# Altium PCB CARD-PIN.PCBDOC (part 1 of 2)
Units mil, origin at the board's own origin, x right, y up, seen from the top; angles counter-clockwise.
Board outline 5110 x 4320 mil, 2 copper layers (Top Layer, Bottom Layer); 210 components, 32 nets, 825 pads, 362 vias.
Unrouted connection lines stored in the file: 455.
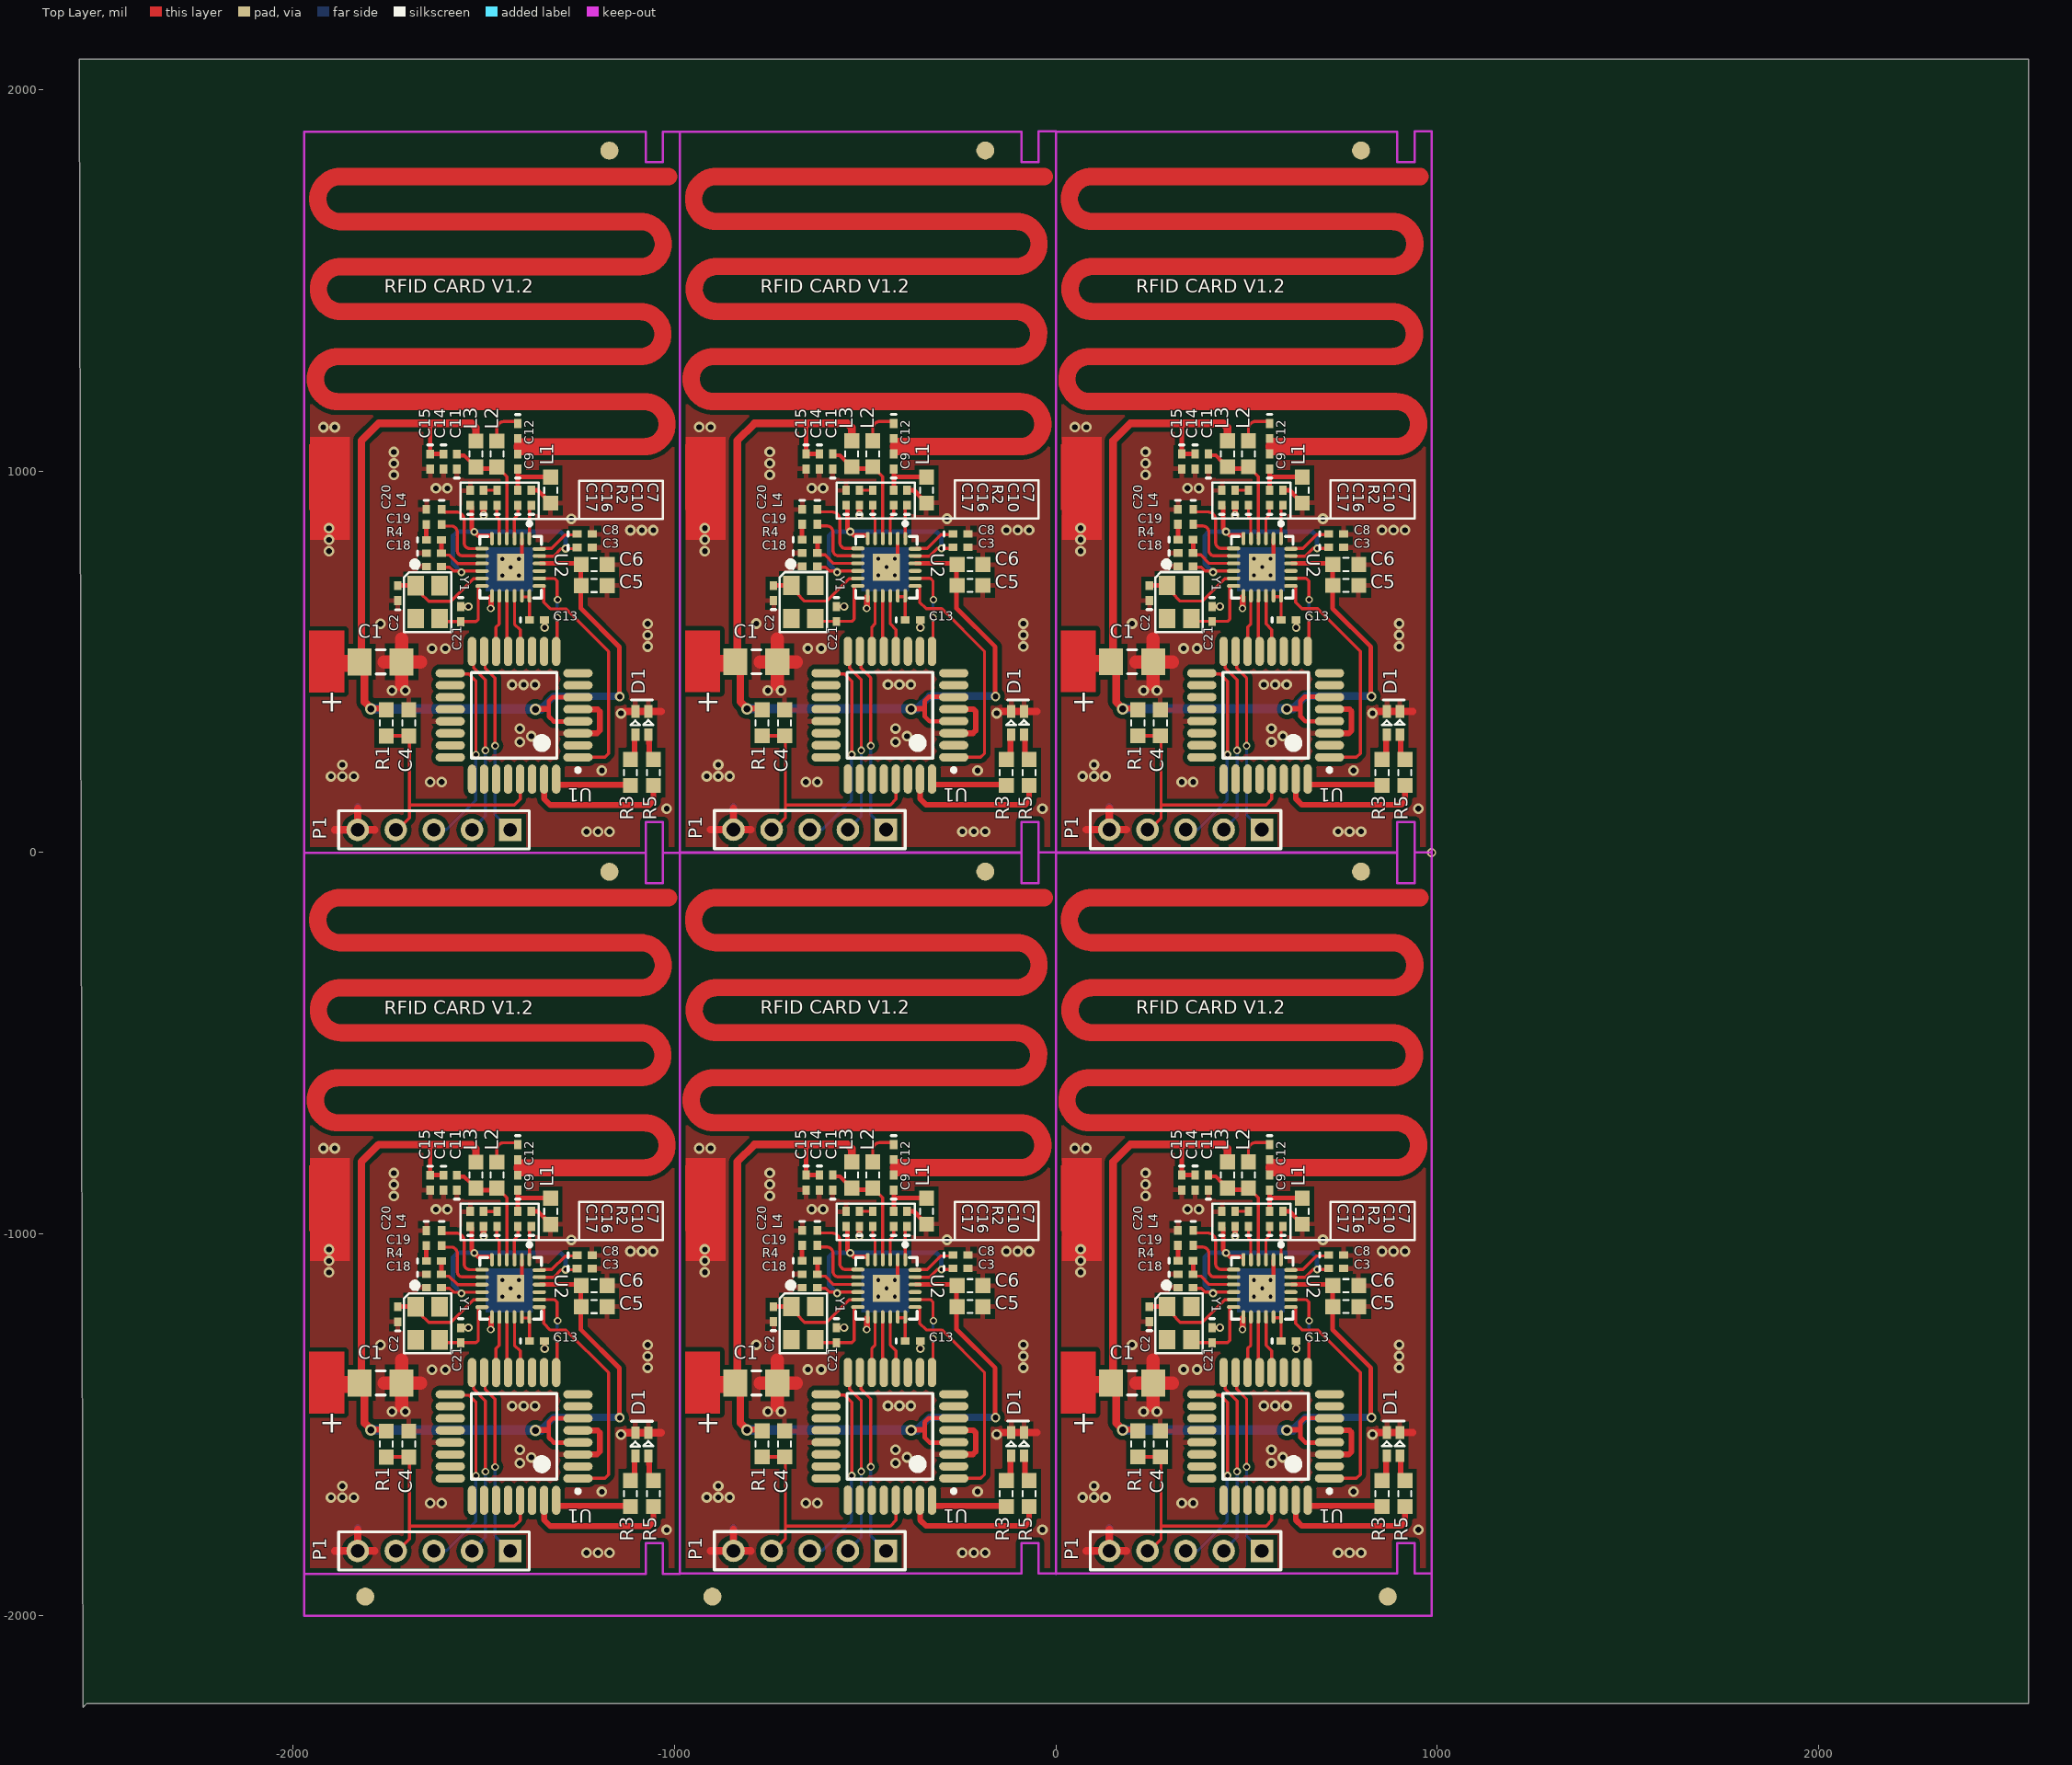
[diagram p0: Top Layer view]
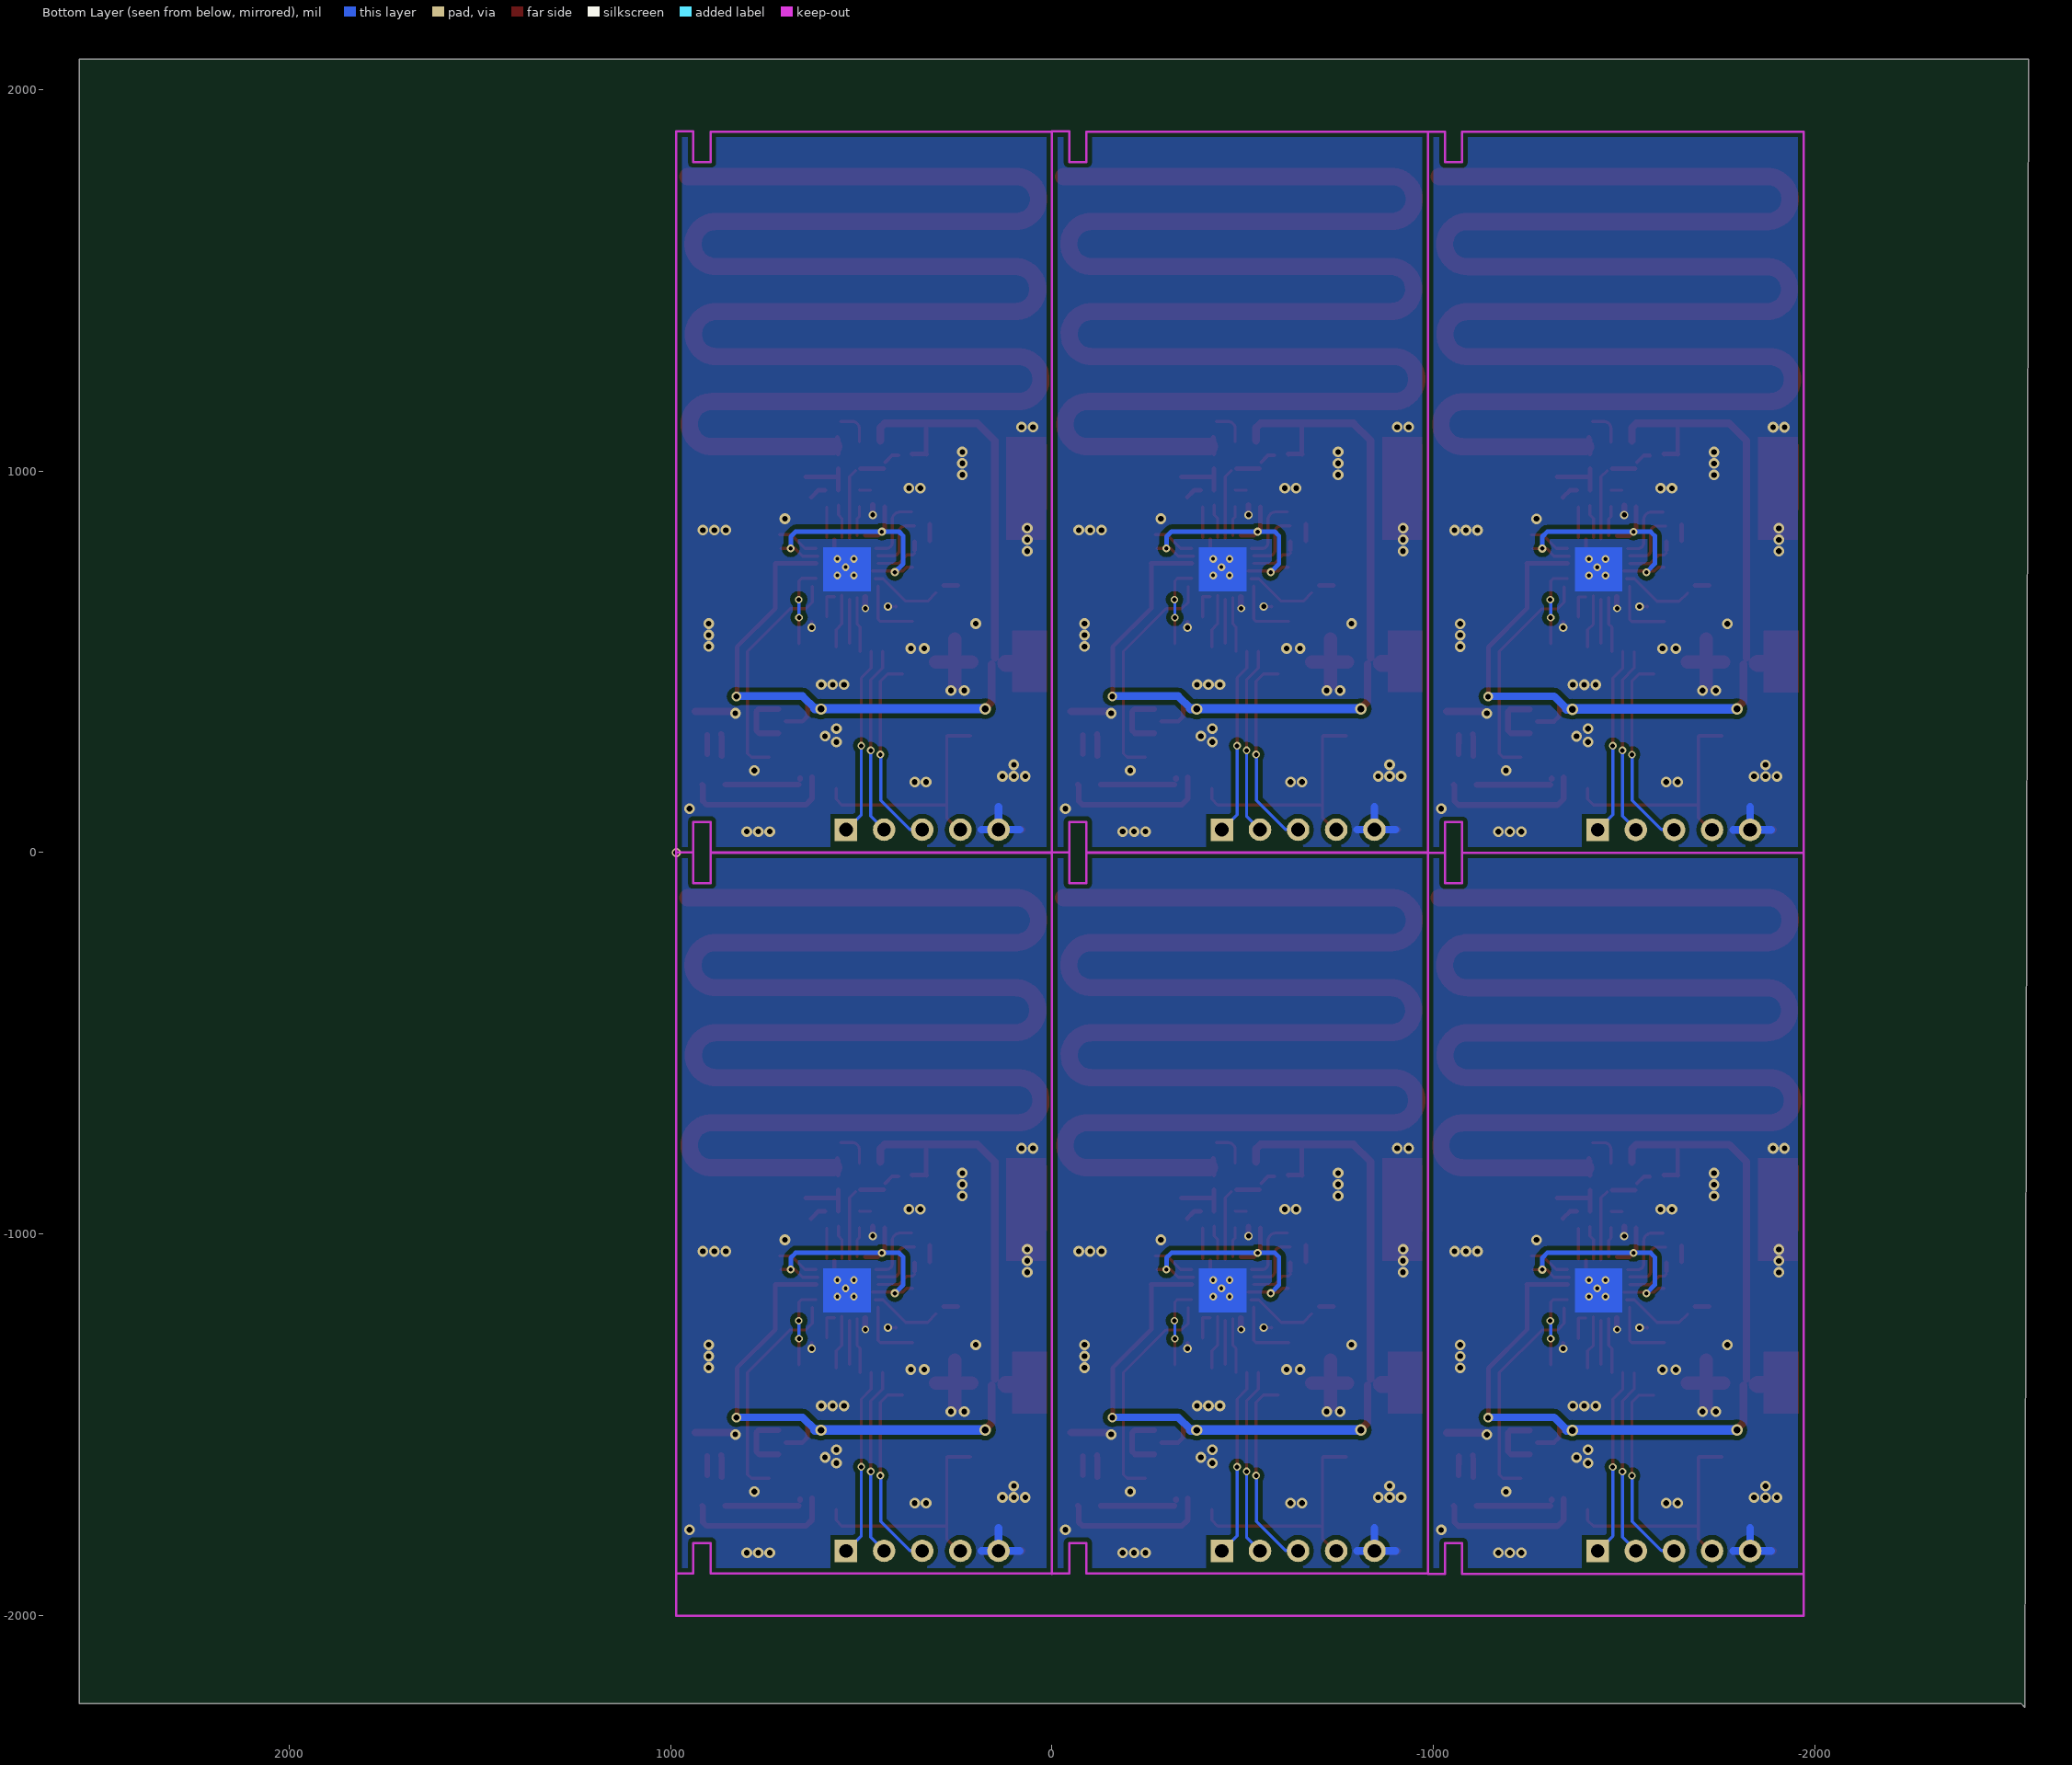
[diagram p1: Bottom Layer view, seen from below]

## Layer stack, top to bottom
Top Layer: signal copper 1.4
Dielectric: core 12.6, FR-4, Dk 4.8
Bottom Layer: signal copper 1.4

## Board outline
-2560,2080 2550,2080 2550,-2230 -2540,-2230 -2550,-2240

## Design rules (kind name [scope] priority, off if disabled: settings)
Clearance [All] p1 off: gap=8
ComponentClearance [All] p1 off: gap=10 collisioncheckmode=3 verticalgap=10
DiffPairsRouting [All] p1 off: maxlimit=10 minlimit=10 mostfreqgap=10 maxuncoupledlength=500
HoleSize [All] p1: absolutevalues=TRUE maxlimit=100 minlimit=0 maxpercent=80.000 minpercent=20.000
PolygonConnect [All] p1: connectstyle=Relief reliefconductorwidth=12 reliefentries=4 polygonreliefangle="90 Angle"
RoutingVias [All] p1: holewidth=15 width=25 viastyle="Through Hole" minholewidth=8 minwidth=15 maxholewidth=80 maxwidth=50
SolderMaskExpansion [All] p1: expansion=4
TestPointUsage [All] p1: valid=0 allowmultiple=FALSE
Testpoint [All] p1: side=15 testpointundercomponent=TRUE minsize=40 maxsize=100 preferedsize=60 minholesize=0 maxholesize=40 preferedholesize=32 testpointgrid=1 style=1023 order=0123456789
Width [All] p1: maxlimit=100 minlimit=8 preferedwidth=10 minimp=50.000000 maximp=50.000000 favimp=50.000000
16 further rules are at their usual default settings.

## Classes and differential pairs
component class card: C1 C2 C3 C4 C5 C6 C7 C8 C9 C10 C11 C12 C13 C14 C15 C16 C17 C18 C19 C20 C21 D1 D2 L1 L2 L3 L4 P1 P3 R1 R2 R3 R4 R5 U1 U2 Y1

## Components (designator, comment, footprint, x,y, rotation, side; value= is the part's Value field where it differs from the comment)
C1 "Cap" 3216[1206] 200,-1390 r180 top
C1 "Cap" 3216[1206] -785,-1390 r180 top
C1 "Cap" 3216[1206] -1770,-1390.24 r180 top
C1 "Cap" 3216[1206] -1770,499.76 r180 top
C1 "Cap" 3216[1206] -785,500 r180 top
C1 "Cap" 3216[1206] 200,500 r180 top
C2 "Cap" 0402-A 245,-1210 r90 top
C2 "Cap" 0402-A -740,-1210 r90 top
C2 "Cap" 0402-A -1725,-1210.24 r90 top
C2 "Cap" 0402-A -1725,679.76 r90 top
C2 "Cap" 0402-A -740,680 r90 top
C2 "Cap" 0402-A 245,680 r90 top
C3 "Cap" 0402-A 735,-1090 r0 top
C3 "Cap" 0402-A -250,-1090 r0 top
C3 "Cap" 0402-A -1235,-1090.24 r0 top
C3 "Cap" 0402-A -1235,799.76 r0 top
C3 "Cap" 0402-A -250,800 r0 top
C3 "Cap" 0402-A 735,800 r0 top
C4 "Cap" 0603 274,-1550 r90 top
C4 "Cap" 0603 -711,-1550 r90 top
C4 "Cap" 0603 -1696,-1550.24 r90 top
C4 "Cap" 0603 -1696,339.76 r90 top
C4 "Cap" 0603 -711,340 r90 top
C4 "Cap" 0603 274,340 r90 top
C5 "Cap" 0603 760,-1190 r0 top
C5 "Cap" 0603 -225,-1190 r0 top
C5 "Cap" 0603 -1210,-1190.24 r0 top
C5 "Cap" 0603 -1210,699.76 r0 top
C5 "Cap" 0603 -225,700 r0 top
C5 "Cap" 0603 760,700 r0 top
C6 "Cap" 0603 760,-1135 r0 top
C6 "Cap" 0603 -225,-1135 r0 top
C6 "Cap" 0603 -1210,-1135.24 r0 top
C6 "Cap" 0603 -1210,754.76 r0 top
C6 "Cap" 0603 -225,755 r0 top
C6 "Cap" 0603 760,755 r0 top
C7 "Cap" 0402-A 595,-960 r90 top
C7 "Cap" 0402-A -390,-960 r90 top
C7 "Cap" 0402-A -1375,-960.24 r90 top
C7 "Cap" 0402-A -1375,929.76 r90 top
C7 "Cap" 0402-A -390,930 r90 top
C7 "Cap" 0402-A 595,930 r90 top
C8 "Cap" 0402-A 735,-1055 r0 top
C8 "Cap" 0402-A -250,-1055 r0 top
C8 "Cap" 0402-A -1235,-1055.24 r0 top
C8 "Cap" 0402-A -1235,834.76 r0 top
C8 "Cap" 0402-A -250,835 r0 top
C8 "Cap" 0402-A 735,835 r0 top
C9 "Cap" 0402-A 560,-865 r90 top
C9 "Cap" 0402-A -425,-865 r90 top
C9 "Cap" 0402-A -1410,-865.24 r90 top
C9 "Cap" 0402-A -1410,1024.76 r90 top
C9 "Cap" 0402-A -425,1025 r90 top
C9 "Cap" 0402-A 560,1025 r90 top
C10 "Cap" 0402-A 560,-960 r90 top
C10 "Cap" 0402-A -425,-960 r90 top
C10 "Cap" 0402-A -1410,-960.24 r90 top
C10 "Cap" 0402-A -1410,929.76 r90 top
C10 "Cap" 0402-A -425,930 r90 top
C10 "Cap" 0402-A 560,930 r90 top
C11 "Cap" 0402-A 400,-865 r90 top
C11 "Cap" 0402-A -585,-865 r90 top
C11 "Cap" 0402-A -1570,-865.24 r90 top
C11 "Cap" 0402-A -1570,1024.76 r90 top
C11 "Cap" 0402-A -585,1025 r90 top
C11 "Cap" 0402-A 400,1025 r90 top
C12 "Cap" 0402-A 560,-785 r270 top
C12 "Cap" 0402-A -425,-785 r270 top
C12 "Cap" 0402-A -1410,-785.24 r270 top
C12 "Cap" 0402-A -1410,1104.76 r270 top
C12 "Cap" 0402-A -425,1105 r270 top
C12 "Cap" 0402-A 560,1105 r270 top
C13 "Cap" 0402-A 610,-1280 r0 top
C13 "Cap" 0402-A -375,-1280 r0 top
C13 "Cap" 0402-A -1360,-1280.24 r0 top
C13 "Cap" 0402-A -1360,609.76 r0 top
C13 "Cap" 0402-A -375,610 r0 top
C13 "Cap" 0402-A 610,610 r0 top
C14 "Cap" 0402-A 365,-865 r270 top
C14 "Cap" 0402-A -620,-865 r270 top
C14 "Cap" 0402-A -1605,-865.24 r270 top
C14 "Cap" 0402-A -1605,1024.76 r270 top
C14 "Cap" 0402-A -620,1025 r270 top
C14 "Cap" 0402-A 365,1025 r270 top
C15 "Cap" 0402-A 330,-865 r270 top
C15 "Cap" 0402-A -655,-865 r270 top
C15 "Cap" 0402-A -1640,-865.24 r270 top
C15 "Cap" 0402-A -1640,1024.76 r270 top
C15 "Cap" 0402-A -655,1025 r270 top
C15 "Cap" 0402-A 330,1025 r270 top
C16 "Cap" 0402-A 470,-960 r90 top
C16 "Cap" 0402-A -515,-960 r90 top
C16 "Cap" 0402-A -1500,-960.24 r90 top
C16 "Cap" 0402-A -1500,929.76 r90 top
C16 "Cap" 0402-A -515,930 r90 top
C16 "Cap" 0402-A 470,930 r90 top
C17 "Cap" 0402-A 435,-960 r90 top
C17 "Cap" 0402-A -550,-960 r90 top
C17 "Cap" 0402-A -1535,-960.24 r90 top
C17 "Cap" 0402-A -1535,929.76 r90 top
C17 "Cap" 0402-A -550,930 r90 top
C17 "Cap" 0402-A 435,930 r90 top
C18 "Cap" 0402-A 340,-1140 r0 top
C18 "Cap" 0402-A -645,-1140 r0 top
C18 "Cap" 0402-A -1630,-1140.24 r0 top
C18 "Cap" 0402-A -1630,749.76 r0 top
C18 "Cap" 0402-A -645,750 r0 top
C18 "Cap" 0402-A 340,750 r0 top
C19 "Cap" 0402-A 340,-1105 r0 top
C19 "Cap" 0402-A -645,-1105 r0 top
C19 "Cap" 0402-A -1630,-1105.24 r0 top
C19 "Cap" 0402-A -1630,784.76 r0 top
C19 "Cap" 0402-A -645,785 r0 top
C19 "Cap" 0402-A 340,785 r0 top
C20 "Cap" 0402-A 320,-1010 r270 top
C20 "Cap" 0402-A -665,-1010 r270 top
C20 "Cap" 0402-A -1650,-1010.24 r270 top
C20 "Cap" 0402-A -1650,879.76 r270 top
C20 "Cap" 0402-A -665,880 r270 top
C20 "Cap" 0402-A 320,880 r270 top
C21 "Cap" 0402-A 410,-1265 r270 top
C21 "Cap" 0402-A -575,-1265 r270 top
C21 "Cap" 0402-A -1560,-1265.24 r270 top
C21 "Cap" 0402-A -1560,624.76 r270 top
C21 "Cap" 0402-A -575,625 r270 top
C21 "Cap" 0402-A 410,625 r270 top
D1 "LED" 0603-LED-DOUBLE 902,-1580 r90 top
D1 "LED" 0603-LED-DOUBLE -83,-1580 r90 top
D1 "LED" 0603-LED-DOUBLE -1068,-1580.24 r90 top
D1 "LED" 0603-LED-DOUBLE -1068,309.76 r90 top
D1 "LED" 0603-LED-DOUBLE -83,310 r90 top
D1 "LED" 0603-LED-DOUBLE 902,310 r90 top
L1 "Inductor" 0603 646,-940 r270 top
L1 "Inductor" 0603 -339,-940 r270 top
L1 "Inductor" 0603 -1324,-940.24 r270 top
L1 "Inductor" 0603 -1324,949.76 r270 top
L1 "Inductor" 0603 -339,950 r270 top
L1 "Inductor" 0603 646,950 r270 top
L2 "Inductor" 0603 505,-845 r90 top
L2 "Inductor" 0603 -480,-845 r90 top
L2 "Inductor" 0603 -1465,-845.24 r90 top
L2 "Inductor" 0603 -1465,1044.76 r90 top
L2 "Inductor" 0603 -480,1045 r90 top
L2 "Inductor" 0603 505,1045 r90 top
L3 "Inductor" 0603 450,-845 r90 top
L3 "Inductor" 0603 -535,-845 r90 top
L3 "Inductor" 0603 -1520,-845.24 r90 top
L3 "Inductor" 0603 -1520,1044.76 r90 top
L3 "Inductor" 0603 -535,1045 r90 top
L3 "Inductor" 0603 450,1045 r90 top
L4 "Inductor" 0402-A 360,-1010 r270 top
L4 "Inductor" 0402-A -625,-1010 r270 top
L4 "Inductor" 0402-A -1610,-1010.24 r270 top
L4 "Inductor" 0402-A -1610,879.76 r270 top
L4 "Inductor" 0402-A -625,880 r270 top
L4 "Inductor" 0402-A 360,880 r270 top
P1 "ISP" HDR1X5 540,-1830 r180 top
P1 "ISP" HDR1X5 -445,-1830 r180 top
P1 "ISP" HDR1X5 -1430,-1830.24 r180 top
P1 "ISP" HDR1X5 -1430,59.76 r180 top
P1 "ISP" HDR1X5 -445,60 r180 top
P1 "ISP" HDR1X5 540,60 r180 top
R1 "Res1" 0603 215,-1550 r90 top
R1 "Res1" 0603 -770,-1550 r90 top
R1 "Res1" 0603 -1755,-1550.24 r90 top
R1 "Res1" 0603 -1755,339.76 r90 top
R1 "Res1" 0603 -770,340 r90 top
R1 "Res1" 0603 215,340 r90 top
R2 "Res1" 0402-A 505,-960 r90 top
R2 "Res1" 0402-A -480,-960 r90 top
R2 "Res1" 0402-A -1465,-960.24 r90 top
R2 "Res1" 0402-A -1465,929.76 r90 top
R2 "Res1" 0402-A -480,930 r90 top
R2 "Res1" 0402-A 505,930 r90 top
R3 "Res1" 0603 855,-1680 r90 top
R3 "Res1" 0603 -130,-1680 r90 top
R3 "Res1" 0603 -1115,-1680.24 r90 top
R3 "Res1" 0603 -1115,209.76 r90 top
R3 "Res1" 0603 -130,210 r90 top
R3 "Res1" 0603 855,210 r90 top
R4 "Res1" 0402-A 340,-1070 r0 top
R4 "Res1" 0402-A -645,-1070 r0 top
R4 "Res1" 0402-A -1630,-1070.24 r0 top
R4 "Res1" 0402-A -1630,819.76 r0 top
R4 "Res1" 0402-A -645,820 r0 top
R4 "Res1" 0402-A 340,820 r0 top
R5 "Res1" 0603 915,-1680 r90 top
R5 "Res1" 0603 -70,-1680 r90 top
R5 "Res1" 0603 -1055,-1680.24 r90 top
R5 "Res1" 0603 -1055,209.76 r90 top
R5 "Res1" 0603 -70,210 r90 top
R5 "Res1" 0603 915,210 r90 top
U1 "ATmega8-16AC" 32A_M 550,-1530 r180 top
U1 "ATmega8-16AC" 32A_M -435,-1530 r180 top
U1 "ATmega8-16AC" 32A_M -1420,-1530.24 r180 top
U1 "ATmega8-16AC" 32A_M -1420,359.76 r180 top
U1 "ATmega8-16AC" 32A_M -435,360 r180 top
U1 "ATmega8-16AC" 32A_M 550,360 r180 top
U2 "A7139" QFN24N 541,-1142 r270 top
U2 "A7139" QFN24N -444,-1142 r270 top
U2 "A7139" QFN24N -1429,-1142.24 r270 top
U2 "A7139" QFN24N -1429,747.76 r270 top
U2 "A7139" QFN24N -444,748 r270 top
U2 "A7139" QFN24N 541,748 r270 top
Y1 "12.8M CL=20pF" XT3225 355,-1190 r270 top
Y1 "12.8M CL=20pF" XT3225 -630,-1190 r270 top
Y1 "12.8M CL=20pF" XT3225 -1615,-1190.24 r270 top
Y1 "12.8M CL=20pF" XT3225 -1615,699.76 r270 top
Y1 "12.8M CL=20pF" XT3225 -630,700 r270 top
Y1 "12.8M CL=20pF" XT3225 355,700 r270 top

## Footprints (in the part's own frame and the unit in brackets; to place one, negate y for a bottom-side part, rotate by r counter-clockwise, add the part's x,y. Pads: shape width x height; smd on the part's side, far side on the other; paste and mask are expansions set on the pad)
32A_M [mm] "32-Pin Thin Quad Flat Pack 0.8 mm Pitch, IPC Low Density"
  oval 1.95x0.559 smd: 1(-4.25,2.8) 2(-4.25,2) 3(-4.25,1.2) 4(-4.25,0.4) 5(-4.25,-0.4) 6(-4.25,-1.2) 7(-4.25,-2) 8(-4.25,-2.8) 17(4.25,-2.8) 18(4.25,-2) 19(4.25,-1.2) 20(4.25,-0.4) 21(4.25,0.4) 22(4.25,1.2) 23(4.25,2) 24(4.25,2.8)
  oval 0.559x1.95 smd: 9(-2.8,-4.25) 10(-2,-4.25) 11(-1.2,-4.25) 12(-0.4,-4.25) 13(0.4,-4.25) 14(1.2,-4.25) 15(2,-4.25) 16(2.8,-4.25) 25(2.8,4.25) 26(2,4.25) 27(1.2,4.25) 28(0.4,4.25) 29(-0.4,4.25) 30(-1.2,4.25) 31(-2,4.25) 32(-2.8,4.25)
  silkscreen extent -4.38,-2.85 2.85,3.77, body extent -3.5,-3.5 3.5,3.5, height 1.2
0402-A [mm] "Chip Inductor; Body 1 x 0.5 mm (LxW typ)"
  rect 0.6x0.5 smd: 1(-0.5,0) 2(0.5,0)
  silkscreen extent -1.1,-0.15 -1.1,0.15
0603 [mm]
  rect 1x1 smd: 1(-0.864,0) 2(0.864,0)
  silkscreen extent -0.18,-0.43 0.18,0.43
0603-LED-DOUBLE [mil]
  rect 33x22 smd: 1(-1,34) 2(-1,0) 3(60,34) 4(60,0)
  silkscreen extent 24,-12 90,47
3216[1206] [mm] "Chip Resistor; Body 3.2 x 1.6 mm (LxW typ)"
  rect 1.6x1.8 smd: 1(-1.4,0) 2(1.4,0)
  silkscreen extent -0.3,-0.8 0.3,0.8
HDR1X5 [mm] "Connector; Header; 5 Position"
  rect 1.5x1.5 hole 0.9: 1(0,0)
  round 1.5 hole 0.9: 2(2.54,0) 3(5.08,0) 4(7.62,0) 5(10.16,0)
  silkscreen extent -1.27,-1.27 11.43,1.27
QFN24N [mm] "QFN, 24-Leads, Body 4.1x4.1mm (max), Pitch 0.50mm, IPC Medium Density"
  oval 0.889x0.25 smd: 1(-1.905,1.25) 2(-1.905,0.75) 3(-1.905,0.25) 4(-1.905,-0.25) 5(-1.905,-0.75) 6(-1.905,-1.25) 13(1.905,-1.25) 14(1.905,-0.75) 15(1.905,-0.25) 16(1.905,0.25) 17(1.905,0.75) 18(1.905,1.25)
  oval 0.25x0.889 smd: 7(-1.25,-1.905) 8(-0.75,-1.905) 9(-0.25,-1.905) 10(0.25,-1.905) 11(0.75,-1.905) 12(1.25,-1.905) 19(1.25,1.905) 20(0.75,1.905) 21(0.25,1.905) 22(-0.25,1.905) 23(-0.75,1.905) 24(-1.219,1.905)
  rect 1.8x1.8 smd: 25(0,0)
  silkscreen extent -3.02,-2.05 2.05,2.05, body extent -2.05,-2.05 2.05,2.05, height 0.8
XT3225 [mm]
  rect 1.3x1.1 smd: 1(0,-1.6) 2(2.2,-1.6) 3(2.2,0) 4(0,0)
  silkscreen extent -1.6,-2.39 3.1,0.76

## Part data
C1 C1 C1 C1 C1 C1 C2 C2 C2 C2 C2 C2 C3 C3 C3 C3 C3 C3 C4 C4 C4 C4 C4 C4 C5 C5 C5 C5 C5 C5 C6 C6 C6 C6 C6 C6 C7 C7 C7 C7 C7 C7 C8 C8 C8 C8 C8 C8 C9 C9 C9 C9 C9 C9 C10 C10 C10 C10 C10 C10 C11 C11 C11 C11 C11 C11 C12 C12 C12 C12 C12 C12 C13 C13 C13 C13 C13 C13 C14 C14 C14 C14 C14 C14 C15 C15 C15 C15 C15 C15 C16 C16 C16 C16 C16 C16 C17 C17 C17 C17 C17 C17 C18 C18 C18 C18 C18 C18 C19 C19 C19 C19 C19 C19 C20 C20 C20 C20 C20 C20 C21 C21 C21 C21 C21 C21: "Capacitor"
D1 D1 D1 D1 D1 D1: library part LED-DOUBLE
P1 P1 P1 P1 P1 P1: library part "Header 5", "Header, 5-Pin"
R1 R1 R1 R1 R1 R1 R2 R2 R2 R2 R2 R2 R3 R3 R3 R3 R3 R3 R4 R4 R4 R4 R4 R4 R5 R5 R5 R5 R5 R5: "Resistor"
U1 U1 U1 U1 U1 U1: "8-Bit AVR Microcontroller with 8K Bytes of In-System Programmable Flash Memory"
Y1 Y1 Y1 Y1 Y1 Y1: library part XTAL, "Crystal Oscillator"

## Free pads (board coordinates)
  round 47.24 smd: 3(-1810,-1950) 3(-1170,-50.24) 3(-1170,1839.76) 3(-900,-1950) 3(-185,-50) 3(-185,1840) 3(800,-50) 3(800,1840) 3(870,-1950) 6(-3040,-5740.71) 6(-3040,-3850.71) 6(-2055,-5740.47) 6(-2055,-5740.47) 6(-2055,-3850.47) 6(-2055,-3850.47) 6(-1070,-5740.47) 6(-1070,-5740.24) 6(-1070,-5740.24) 6(-1070,-3850.47) 6(-1070,-3850.24) 6(-1070,-3850.24) 6(-85,-5740.24) 6(-85,-5740) 6(-85,-3850.24) 6(-85,-3850) 6(900,-5740) 6(900,-3850) 7(-5740,-5740.71) 7(-5740,-3850.71) 7(-4755,-5740.47) 7(-4755,-5740.47) 7(-4755,-3850.47) 7(-4755,-3850.47) 7(-3770,-5740.47) 7(-3770,-5740.24) 7(-3770,-5740.24) 7(-3770,-3850.47) 7(-3770,-3850.24) 7(-3770,-3850.24) 7(-2785,-5740.24) 7(-2785,-5740) 7(-2785,-3850.24) 7(-2785,-3850) 7(-1800,-5740) 7(-1800,-3850)

## Via types
v1: diameter 28, hole 15, Top Layer to Bottom Layer, 240 vias
v2: diameter 20, hole 12, Top Layer to Bottom Layer, 36 vias
v3: diameter 20, hole 10, Top Layer to Bottom Layer, tented top, 30 vias
v4: diameter 21, hole 11, Top Layer to Bottom Layer, 18 vias
v5: diameter 22, hole 13, Top Layer to Bottom Layer, 18 vias
v6: diameter 30, hole 18, Top Layer to Bottom Layer, 12 vias
v7: diameter 25, hole 15, Top Layer to Bottom Layer, 6 vias
v8: diameter 24, hole 15, Top Layer to Bottom Layer, 2 vias

## Nets (pads, with @x,y where several pads share a name; then routed paths per layer and width w, separated by ;. In a path a pad name is that pad's centre, name@x,y a point inside that pad or via, vN(x,y) a via of type N, cw(c..) or ccw(c..) an arc to the next point about the centre after c; other vN are vias at no path point)
GIO1: U1.1 U2.19 | length 3555.5
  Top Layer w8: U2.19@-1342,-1193.24 -1342,-1234.24 -1325,-1251.24 -1284,-1251.24 -1172,-1363.24 -1172,-1630.24 -1182,-1640.24 U1.1@-1229,-1640.24 ; U2.19@-1342,696.76 -1342,655.76 -1325,638.76 -1284,638.76 -1172,526.76 -1172,259.76 -1182,249.76 U1.1@-1229,249.76 ; U2.19@-357,-1193 -357,-1234 -340,-1251 -299,-1251 -187,-1363 -187,-1630 -197,-1640 U1.1@-244,-1640 ; U2.19@-357,697 -357,656 -340,639 -299,639 -187,527 -187,260 -197,250 U1.1@-244,250 ; U2.19@628,-1193 628,-1234 645,-1251 686,-1251 798,-1363 798,-1630 788,-1640 U1.1@741,-1640 ; U2.19@628,697 628,656 645,639 686,639 798,527 798,260 788,250 U1.1@741,250
GIO2: U1.9 U2.20 | length 1283.3
  Top Layer w8: U2.20@-1351.44,-1171.76 -1313.47,-1171.76 -1307,-1178.24 v2@-1307,-1228.24 ; U2.20@-1351.44,718.24 -1313.47,718.24 -1307,711.76 v2@-1307,661.76 ; U1.9@-1307,-1343 v2(-1307,-1274.24) ; U1.9@-1307,547 v2(-1307,615.76) ; U2.20@-366.44,-1171.53 -328.47,-1171.53 -322,-1178 v2@-322,-1228 ; U2.20@-366.44,718.47 -328.47,718.47 -322,712 v2@-322,662 ; U1.9@-322,-1342.76 v2(-322,-1274) ; U1.9@-322,547.24 v2(-322,616) ; U2.20@618.56,-1171.53 656.53,-1171.53 663,-1178 v2@663,-1228 ; U2.20@618.56,718.47 656.53,718.47 663,712 v2@663,662 ; U1.9@663,-1342.76 v2(663,-1274) ; U1.9@663,547.24 v2(663,616)
  Bottom Layer w8: v2@-1307,-1271.24 v2@-1307,-1223.24 ; v2@-1307,618.76 v2@-1307,666.76 ; v2@-322,-1271 v2@-322,-1223 ; v2@-322,619 v2@-322,667 ; v2@663,-1271 v2@663,-1223 ; v2@663,619 v2@663,667
  other v2: -1306,-1227.24 -321,-1227 664,-1227 -1306,662.76 -321,663 664,663
GND: C1.1 C2.1 C3.2 C4.2 C5.2 C6.2 C7.2 C8.2 C11.1 C13.2 C14.2 C15.2 C16.1 C17.2 C18.1 C19.1 C20.1 C21.1 D1.3 D1.4 L1.2 P1.5 U1.3 U1.5 U1.21 U2.2 U2.13 U2.25 | length 5774.5
  Top Layer w10: v5@-1550,-1245.24 v5@-1541,-1245.24 ; v5@-1550,644.76 v5@-1541,644.76 ; U2.25@-1399.47,-1112.71 U2.2@-1399.47,-1069.24 ; U2.25@-1399.47,777.29 U2.2@-1399.47,820.76 ; v5@-1340,-1299.38 C13.2@-1340,-1285.24 ; v5@-1340,590.62 C13.2@-1340,604.76 ; v5@-565,-1245 v5@-556,-1245 ; v5@-565,645 v5@-556,645 ; U2.25@-414.47,-1112.47 U2.2@-414.47,-1069 ; U2.25@-414.47,777.53 U2.2@-414.47,821 ; v5@-355,-1299.14 C13.2@-355,-1285 ; v5@-355,590.86 C13.2@-355,605 ; v5@420,-1245 v5@429,-1245 ; v5@420,645 v5@429,645 ; U2.25@570.53,-1112.47 U2.2@570.53,-1069 ; U2.25@570.53,777.53 U2.2@570.53,821 ; v5@630,-1299.14 C13.2@630,-1285 ; v5@630,590.86 C13.2@630,605
  Top Layer w12: C7.2@-1375,-940.55 -1357.69,-940.55 L1.2@-1339,-959.24 ; C7.2@-1375,949.45 -1357.69,949.45 L1.2@-1339,930.76 ; C7.2@-390,-940.31 -372.69,-940.31 L1.2@-354,-959 ; C7.2@-390,949.69 -372.69,949.69 L1.2@-354,931 ; C7.2@595,-940.31 612.31,-940.31 L1.2@631,-959 ; C7.2@595,949.69 612.31,949.69 L1.2@631,931
  Top Layer w15: v5@-1500,-1006.24 C16.1@-1500,-979.92 ; v5@-1500,883.76 C16.1@-1500,910.08 ; v2@-1480,-1250.24 U2.13@-1480,-1220.24 ; v2@-1480,639.76 U2.13@-1480,669.76 ; U1.3@-1252.68,-1577.48 -1202.24,-1577.48 -1195,-1570.24 -1195,-1520.24 -1200.75,-1514.49 U1.5@-1252.68,-1514.49 ; U1.3@-1252.68,312.52 -1202.24,312.52 -1195,319.76 -1195,369.76 -1200.75,375.51 U1.5@-1252.68,375.51 ; v5@-515,-1006 C16.1@-515,-979.68 ; v5@-515,884 C16.1@-515,910.32 ; v2@-495,-1250 U2.13@-495,-1220 ; v2@-495,640 U2.13@-495,670 ; U1.3@-267.68,-1577.24 -217.24,-1577.24 -210,-1570 -210,-1520 -215.75,-1514.25 U1.5@-267.68,-1514.25 ; U1.3@-267.68,312.76 -217.24,312.76 -210,320 -210,370 -215.75,375.75 U1.5@-267.68,375.75 ; v5@470,-1006 C16.1@470,-979.68 ; v5@470,884 C16.1@470,910.32 ; v2@490,-1250 U2.13@490,-1220 ; v2@490,640 U2.13@490,670 ; U1.3@717.32,-1577.24 767.76,-1577.24 775,-1570 775,-1520 769.25,-1514.25 U1.5@717.32,-1514.25 ; U1.3@717.32,312.76 767.76,312.76 775,320 775,370 769.25,375.75 U1.5@717.32,375.75
  Top Layer w20: -1890,-1830.24 -1785,-1830.24 ; -1890,59.76 -1785,59.76 ; P1.5@-1830,-1830.24 -1830,-1775.24 ; P1.5@-1830,59.76 -1830,114.76 ; v1@-1130,-1520.24 -1035,-1520.24 ; v1@-1130,369.76 -1035,369.76 ; -905,-1830 -800,-1830 ; -905,60 -800,60 ; P1.5@-845,-1830 -845,-1775 ; P1.5@-845,60 -845,115 ; v1@-145,-1520 -50,-1520 ; v1@-145,370 -50,370 ; 80,-1830 185,-1830 ; 80,60 185,60 ; P1.5@140,-1830 140,-1775 ; P1.5@140,60 140,115 ; v1@840,-1520 935,-1520 ; v1@840,370 935,370
  Top Layer w35: -1760,-1390.24 -1665,-1390.24 ; -1760,499.76 -1665,499.76 ; -1715,-1450.24 -1715,-1330.24 ; -1715,439.76 -1715,559.76 ; -775,-1390 -680,-1390 ; -775,500 -680,500 ; -730,-1450 -730,-1330 ; -730,440 -730,560 ; 210,-1390 305,-1390 ; 210,500 305,500 ; 255,-1450 255,-1330 ; 255,440 255,560
  Bottom Layer w20: -1885,-1830.24 -1785,-1830.24 ; -1885,59.76 -1785,59.76 ; P1.5@-1830,-1825.24 -1830,-1770.24 ; P1.5@-1830,64.76 -1830,119.76 ; -900,-1830 -800,-1830 ; -900,60 -800,60 ; P1.5@-845,-1825 -845,-1770 ; P1.5@-845,65 -845,120 ; 85,-1830 185,-1830 ; 85,60 185,60 ; P1.5@140,-1825 140,-1770 ; P1.5@140,65 140,120
  other v1: -1230,-1835.24 -1200,-1835.24 -1170,-1835.24 -245,-1835 -215,-1835 -185,-1835 740,-1835 770,-1835 800,-1835 -1020,-1775.24 -35,-1775 950,-1775 -1640,-1705.24 -1610,-1705.24 -655,-1705 -625,-1705 330,-1705 360,-1705 -1900,-1690.24 -1870,-1690.24 -1840,-1690.24 -915,-1690 -885,-1690 -855,-1690 70,-1690 100,-1690 130,-1690 -1190,-1675.24 -205,-1675 780,-1675 -1870,-1660.24 -885,-1660 100,-1660 -1405,-1600.24 -420,-1600 565,-1600 -1375,-1585.24 -390,-1585 595,-1585 -1405,-1565.24 -420,-1565 565,-1565 -1140,-1525.24 -155,-1525 830,-1525 -1740,-1465.24 -1705,-1465.24 -755,-1465 -720,-1465 230,-1465 265,-1465 -1425,-1450.24 -1395,-1450.24 -1365,-1450.24 -440,-1450 -410,-1450 -380,-1450 545,-1450 575,-1450 605,-1450 -1635,-1355.24 -1600,-1355.24 -650,-1355 -615,-1355 335,-1355 370,-1355 -1070,-1350.24 -85,-1350 900,-1350 -1070,-1320.24 -85,-1320 900,-1320 -1770,-1290.24 -1070,-1290.24 -785,-1290 -85,-1290 200,-1290 900,-1290 -1905,-1100.24 -920,-1100 65,-1100 -1905,-1070.24 -920,-1070 65,-1070 -1115,-1045.24 -1085,-1045.24 -1055,-1045.24 -130,-1045 -100,-1045 -70,-1045 855,-1045 885,-1045 915,-1045 -1905,-1040.24 -920,-1040 65,-1040 -1270,-1015.24 -285,-1015 700,-1015 -1625,-935.24 -1595,-935.24 -640,-935 -610,-935 345,-935 375,-935 -1735,-900.24 -750,-900 235,-900 -1735,-870.24 -750,-870 235,-870 -1735,-840.24 -750,-840 235,-840 -1920,-775.24 -1890,-775.24 -935,-775 -905,-775 50,-775 80,-775 -1230,54.76 -1200,54.76 -1170,54.76 -245,55 -215,55 -185,55 740,55 770,55 800,55 -1020,114.76 -35,115 950,115 -1640,184.76 -1610,184.76 -655,185 -625,185 330,185 360,185 -1900,199.76 -1870,199.76 -1840,199.76 -915,200 -885,200 -855,200 70,200 100,200 130,200 -1190,214.76 -205,215 780,215 -1870,229.76 -885,230 100,230 -1405,289.76 -420,290 565,290 -1375,304.76 -390,305 595,305 -1405,324.76 -420,325 565,325 -1140,364.76 -155,365 830,365 -1740,424.76 -1705,424.76 -755,425 -720,425 230,425 265,425 -1425,439.76 -1395,439.76 -1365,439.76 -440,440 -410,440 -380,440 545,440 575,440 605,440 -1635,534.76 -1600,534.76 -650,535 -615,535 335,535 370,535 -1070,539.76 -85,540 900,540 -1070,569.76 -85,570 900,570 -1770,599.76 -1070,599.76 -785,600 -85,600 200,600 900,600 -1905,789.76 -920,790 65,790 -1905,819.76 -920,820 65,820 -1115,844.76 -1085,844.76 -1055,844.76 -130,845 -100,845 -70,845 855,845 885,845 915,845 -1905,849.76 -920,850 65,850 -1270,874.76 -285,875 700,875 -1625,954.76 -1595,954.76 -640,955 -610,955 345,955 375,955 -1735,989.76 -750,990 235,990 -1735,1019.76 -750,1020 235,1020 -1735,1049.76 -750,1050 235,1050 -1920,1114.76 -1890,1114.76 -935,1115 -905,1115 50,1115 80,1115
  other v2: -1481,-1250.24 -496,-1250 489,-1250 -1481,639.76 -496,640 489,640
  other v3: -1450.65,-1163.89 -1407.35,-1163.89 -465.65,-1163.65 -422.35,-1163.65 519.35,-1163.65 562.65,-1163.65 -1429,-1142.24 -444,-1142 541,-1142 -1450.65,-1120.58 -1407.35,-1120.58 -465.65,-1120.35 -422.35,-1120.35 519.35,-1120.35 562.65,-1120.35 -1450.65,726.11 -1407.35,726.11 -465.65,726.35 -422.35,726.35 519.35,726.35 562.65,726.35 -1429,747.76 -444,748 541,748 -1450.65,769.42 -1407.35,769.42 -465.65,769.65 -422.35,769.65 519.35,769.65 562.65,769.65
  other v5: -1340,-1300.24 -355,-1300 630,-1300 -1540,-1245.24 -555,-1245 430,-1245 -1500,-1005.24 -515,-1005 470,-1005 -1340,589.76 -355,590 630,590 -1540,644.76 -555,645 430,645 -1500,884.76 -515,885 470,885
MISO: P1.2 U1.16 | length 2984
  Top Layer w8: U1.16@-1526,-1363.24 -1526,-1406.24 -1495,-1437.24 v2@-1495,-1620.24 ; U1.16@-1526,526.76 -1526,483.76 -1495,452.76 v2@-1495,269.76 ; U1.16@-541,-1363 -541,-1406 -510,-1437 v2@-510,-1620 ; U1.16@-541,527 -541,484 -510,453 v2@-510,270 ; U1.16@444,-1363 444,-1406 475,-1437 v2@475,-1620 ; U1.16@444,527 444,484 475,453 v2@475,270
  Bottom Layer w8: P1.2@-1530,-1835.24 -1530,-1829.24 -1495,-1794.24 v2(-1495,-1622.24) ; P1.2@-1530,54.76 -1530,60.76 -1495,95.76 v2(-1495,267.76) ; P1.2@-545,-1835 -545,-1829 -510,-1794 v2(-510,-1622) ; P1.2@-545,55 -545,61 -510,96 v2(-510,268) ; P1.2@440,-1835 440,-1829 475,-1794 v2(475,-1622) ; P1.2@440,55 440,61 475,96 v2(475,268)
MOSI: P1.1 U1.15 | length 2976.6
  Top Layer w8: U1.15@-1496,-1362.24 -1496,-1406.24 -1470,-1432.24 v2(-1470,-1610.24) ; U1.15@-1496,527.76 -1496,483.76 -1470,457.76 v2(-1470,279.76) ; U1.15@-511,-1362 -511,-1406 -485,-1432 v2(-485,-1610) ; U1.15@-511,528 -511,484 -485,458 v2(-485,280) ; U1.15@474,-1362 474,-1406 500,-1432 v2(500,-1610) ; U1.15@474,528 474,484 500,458 v2(500,280)
  Bottom Layer w8: v2(-1470,-1610.24) -1470,-1791.24 -1433,-1828.24 P1.1@-1433,-1832.24 ; v2(-1470,279.76) -1470,98.76 -1433,61.76 P1.1@-1433,57.76 ; v2(-485,-1610) -485,-1791 -448,-1828 P1.1@-448,-1832 ; v2(-485,280) -485,99 -448,62 P1.1@-448,58 ; v2(500,-1610) 500,-1791 537,-1828 P1.1@537,-1832 ; v2(500,280) 500,99 537,62 P1.1@537,58
MSCK: P1.3 U1.17 | length 3074.1
  Top Layer w8: U1.17@-1578,-1422.24 -1539,-1422.24 -1520,-1441.24 v2(-1520,-1633.24) ; U1.17@-1578,467.76 -1539,467.76 -1520,448.76 v2(-1520,256.76) ; U1.17@-593,-1422 -554,-1422 -535,-1441 v2(-535,-1633) ; U1.17@-593,468 -554,468 -535,449 v2(-535,257) ; U1.17@392,-1422 431,-1422 450,-1441 v2(450,-1633) ; U1.17@392,468 431,468 450,449 v2(450,257)
  Bottom Layer w8: P1.3@-1624,-1829.24 -1597,-1829.24 -1521,-1753.24 v2@-1521,-1633.24 ; P1.3@-1624,60.76 -1597,60.76 -1521,136.76 v2@-1521,256.76 ; P1.3@-639,-1829 -612,-1829 -536,-1753 v2@-536,-1633 ; P1.3@-639,61 -612,61 -536,137 v2@-536,257 ; P1.3@346,-1829 373,-1829 449,-1753 v2@449,-1633 ; P1.3@346,61 373,61 449,137 v2@449,257
NetC2_2: C2.2 U2.11 Y1.1 | length 1387.5
  Top Layer w8: Y1.1@-1666,-1209.24 -1644,-1231.24 -1586,-1231.24 -1527,-1172.24 U2.11@-1506,-1172.24 ; Y1.1@-1666,680.76 -1644,658.76 -1586,658.76 -1527,717.76 U2.11@-1506,717.76 ; Y1.1@-681,-1209 -659,-1231 -601,-1231 -542,-1172 U2.11@-521,-1172 ; Y1.1@-681,681 -659,659 -601,659 -542,718 U2.11@-521,718 ; Y1.1@304,-1209 326,-1231 384,-1231 443,-1172 U2.11@464,-1172 ; Y1.1@304,681 326,659 384,659 443,718 U2.11@464,718
  Top Layer w12: C2.2@-1723,-1190.24 Y1.1@-1685.31,-1190.24 ; C2.2@-1723,699.76 Y1.1@-1685.31,699.76 ; C2.2@-738,-1190 Y1.1@-700.31,-1190 ; C2.2@-738,700 Y1.1@-700.31,700 ; C2.2@247,-1190 Y1.1@284.69,-1190 ; C2.2@247,700 Y1.1@284.69,700
NetC7_1: C7.1 U2.1 | length 479.8
  Top Layer w8: U2.1@-1379.79,-1064.68 C7.1@-1379.79,-984.71 ; U2.1@-1379.79,825.32 C7.1@-1379.79,905.29 ; U2.1@-394.79,-1064.44 C7.1@-394.79,-984.47 ; U2.1@-394.79,825.56 C7.1@-394.79,905.53 ; U2.1@590.21,-1064.44 C7.1@590.21,-984.47 ; U2.1@590.21,825.56 C7.1@590.21,905.53
NetC8_1: C8.1 U2.24 | length 661.6
  Top Layer w8: U2.24@-1351.44,-1093.02 -1321.79,-1093.02 -1286,-1057.24 C8.1@-1256,-1057.24 ; U2.24@-1351.44,796.98 -1321.79,796.98 -1286,832.76 C8.1@-1256,832.76 ; U2.24@-366.44,-1092.79 -336.79,-1092.79 -301,-1057 C8.1@-271,-1057 ; U2.24@-366.44,797.21 -336.79,797.21 -301,833 C8.1@-271,833 ; U2.24@618.56,-1092.79 648.21,-1092.79 684,-1057 C8.1@714,-1057 ; U2.24@618.56,797.21 648.21,797.21 684,833 C8.1@714,833
NetC9_1: C9.1 C10.2 L1.1 | length 841.9
  Top Layer w12: C10.2@-1410,-940.55 C9.1@-1410,-884.24 ; C10.2@-1410,949.45 C9.1@-1410,1005.76 ; -1408,-905.24 L1.1@-1324,-905.24 ; -1408,984.76 L1.1@-1324,984.76 ; C10.2@-425,-940.32 C9.1@-425,-884 ; C10.2@-425,949.68 C9.1@-425,1006 ; -423,-905 L1.1@-339,-905 ; -423,985 L1.1@-339,985 ; C10.2@560,-940.32 C9.1@560,-884 ; C10.2@560,949.68 C9.1@560,1006 ; 562,-905 L1.1@646,-905 ; 562,985 L1.1@646,985